# Altium PCB PCB1.PcbDoc
Units mil, origin at the board's own origin, x right, y up, seen from the top; angles counter-clockwise.
Board outline 6000 x 4000 mil, 2 copper layers (Top Layer, Bottom Layer); 38 components, 28 nets, 109 pads, 0 vias.
Unrouted connection lines stored in the file: 65.
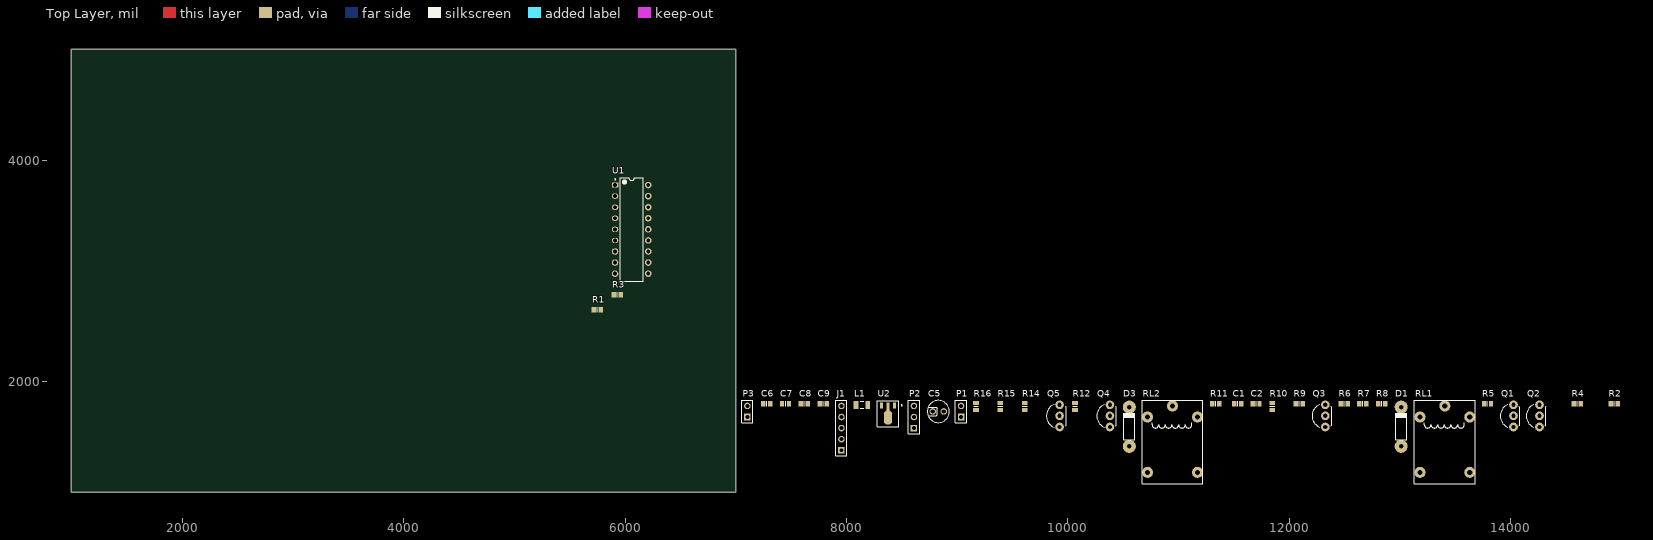
[diagram p0: Top Layer view]
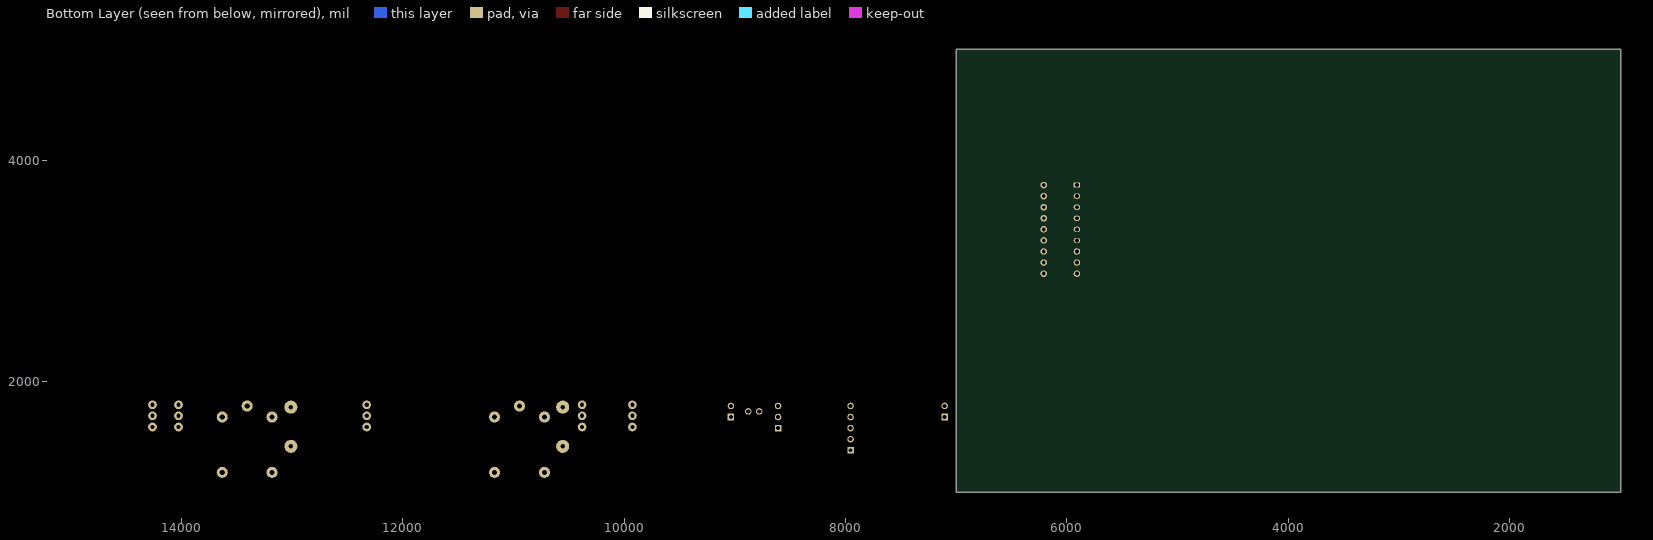
[diagram p1: Bottom Layer view, seen from below]

## Layer stack, top to bottom
Top Solder: solder mask 0.4, Solder Resist, Dk 3.5
Top Layer: signal copper 1.4
Dielectric 1: dielectric 12.6, FR-4, Dk 4.8
Bottom Layer: signal copper 1.4
Bottom Solder: solder mask 0.4, Solder Resist, Dk 3.5

## Board outline
1000,1000 7000,1000 7000,5000 1000,5000

## Design rules (kind name [scope] priority, off if disabled: settings)
Clearance [All] p1: gap=10
PolygonConnect [All] p1: connectstyle=Relief reliefconductorwidth=10 reliefentries=4 polygonreliefangle="90 Angle" airgapwidth=10
RoutingVias [All] p1: holewidth=28 width=50 viastyle="Through Hole" minholewidth=28 minwidth=50 maxholewidth=28 maxwidth=50
SolderMaskExpansion [All] p1: expansion=4
Width [All] p1: maxlimit=10 minlimit=10 preferedwidth=10
30 further rules are at their usual default settings.

## Components (designator, comment, footprint, x,y, rotation, side; value= is the part's Value field where it differs from the comment)
C1 "Cap Semi" RESC2012L 11535,1800 r0 top
C2 "Cap Semi" RESC2012L 11700,1800 r0 top
C5 "Cap Pol1" CAP5 8830,1730 r0 top
C6 "Cap Semi" RESC2012L 7280,1800 r0 top
C7 "Cap Semi" RESC2012L 7450,1800 r0 top
C8 "Cap Semi" RESC2012L 7620,1800 r0 top
C9 "Cap Semi" RESC2012L 7790,1800 r0 top
D1 "" D1A 13010,1415 r90 top
D3 "" D1A 10555,1415 r90 top
J1 "programer" HDR1x5 7955,1380 r90 top
L1 "" INDC3216 8140,1790 r0 top
P1 "LED" HDR1X2 9035,1680 r90 top
P2 "Header 3" HDR1X3 8610,1580 r90 top
P3 "Header 2" HDR1X2 7105,1680 r90 top
Q1 "C2383" C1815 14025,1690 r90 top
Q2 "C2383" C1815 14260,1690 r90 top
Q3 "C1815" C1815 12325,1690 r90 top
Q4 "C1815" C1815 10380,1690 r90 top
Q5 "C1815" C1815 9925,1690 r90 top
R1 "2.2K" RESC2012L 5750,2650 r0 top
R2 "2.2K" RESC2012L 14935,1800 r0 top
R3 "1K" RESC2012L 5930,2785 r0 top
R4 "1K" RESC2012L 14600,1800 r0 top
R5 "470" RESC2012L 13790,1800 r0 top
R6 "10K" RESC2012L 12495,1800 r0 top
R7 "470" RESC2012L 12665,1800 r0 top
R8 "10K" RESC2012L 12835,1800 r0 top
R9 "470" RESC2012L 12090,1800 r0 top
R10 "10K" RESC2012L 11845,1775 r90 top
R11 "470" RESC2012L 11335,1800 r0 top
R12 "470" RESC2012L 10065,1775 r90 top
R14 "470" RESC2012L 9610,1775 r90 top
R15 "10K" RESC2012L 9390,1775 r90 top
R16 "Res3" RESC2012L 9170,1775 r90 top
RL1 "" RL7 13405,1780 r0 top
RL2 "" RL7 10945,1780 r0 top
U1 "PIC18F1220-E/P" PDIP300-P18 6060,3375 r0 top
U2 "µA78L05ACPKR" PK03 8375,1730 r0 top

## Footprints (in the part's own frame and the unit in brackets; to place one, negate y for a bottom-side part, rotate by r counter-clockwise, add the part's x,y. Pads: shape width x height; smd on the part's side, far side on the other; paste and mask are expansions set on the pad)
C1815 [mil]
  round 78 hole 39.37: 1(100,0) 2(0,0) 3(-100,0)
  silkscreen extent -103,-58 103,119
CAP5 [mm]
  round 1.5 hole 1 mask+0.01: 1(1.27,0) 2(-1.27,0)
  silkscreen extent -2.54,-2.54 2.54,2.54
D1A [mm]
  round 3 hole 1: 1(0,0) 2(9,0)
  silkscreen extent 1.5,-1.27 7.6,1.27
HDR1X2 [mm] "Connector; Header; 2 Position"
  rect 1.5x1.5 hole 0.9: 1(0,0)
  round 1.5 hole 0.9: 2(2.54,0)
  silkscreen extent -1.27,-1.27 3.81,1.27
HDR1X3 [mm] "Connector; Header; 3 Position"
  rect 1.5x1.5 hole 0.9: 1(0,0)
  round 1.5 hole 0.9: 2(2.54,0) 3(5.08,0)
  silkscreen extent -1.27,-1.27 6.35,1.27
HDR1x5 [mm] "Connector; Header; 5 Position"
  rect 1.5x1.5 hole 0.9: 1(0,0)
  round 1.5 hole 0.9: 2(2.54,0) 3(5.08,0) 4(7.62,0) 5(10.16,0)
  silkscreen extent -1.27,-1.27 11.43,1.27
INDC3216 [mm] "Chip Inductor, Body 3.2x1.6mm, IPC High Density"
  rect 1.1x1.8 smd: 1(-1.35,0) 2(1.35,0)
  silkscreen extent -0.4,-0.8 0.4,0.8, body extent -1.7,-0.9 1.7,0.9, height 0.55
PDIP300-P18 [mm] "DIP, 18-Leads, Row Spacing 7.62mm, Pitch 2.54mm, Body 22.9x6.6mm"
  rect 1.5x1.2 hole 0.9: 1(-3.81,10.16)
  oval 1.5x1.2 hole 0.9: 2(-3.81,7.62) 3(-3.81,5.08) 4(-3.81,2.54) 5(-3.81,0) 6(-3.81,-2.54)
  round 1.5 hole 0.9: 7(-3.81,-5.08) 8(-3.81,-7.62) 9(-3.81,-10.16) 10(3.81,-10.16) 11(3.81,-7.62) 12(3.81,-5.08) 13(3.81,-2.54) 14(3.81,0) 15(3.81,2.54) 16(3.81,5.08) 17(3.81,7.62) 18(3.81,10.16)
  silkscreen extent -3.93,-11.85 2.65,11.85, body extent -3.6,-11.8 3.6,11.8, height 5.34
PK03 [mm] "SOT-89; Body 4.6 x 4.25 mm, inc. leads (LxW max)"
  rect 0.7x1.35 smd: 1(1.5,1.388) 3(-1.5,1.388)
  rect 0.7x1.8 smd: 2(0,1.162)
  oct 1.9x3.3 smd: 4(0,-1.388)
  silkscreen extent -2.5,-3.49 3.28,2.51
RESC2012L [mm] "Chip Resistor, Body 2.0x1.3mm, IPC High Density"
  rect 1x1.3 smd: 1(-0.8,0) 2(0.8,0)
  silkscreen extent 0,-0.55 0,0.55, body extent -1.07,-0.7 1.07,0.7, height 0.65
RL7 [mm]
  round 2.54 hole 1.2: 1(0,0) 2(5.715,-15.24) 3(-5.715,-15.24) 4(5.715,-2.54) 5(-5.715,-2.54)
  silkscreen extent -6.98,-17.91 6.98,1.27

## Part data
C1 C2 C6 C7 C8 C9: "Capacitor (Semiconductor SIM Model)"
C5: "Polarized Capacitor (Radial)"
D1 D3: library part DIODE, "Diode"
J1: library part CON5, "Connector"
L1: library part Inductor, "Inductor"
P1: library part "Header 2", "Header, 2-Pin"
P2: "Header, 3-Pin"
P3: "Header, 2-Pin"
Q1 Q2 Q3 Q4 Q5: library part NPN, "NPN Transistor"
R1 R2 R3 R4 R5 R6 R7 R8 R9 R10 R11 R12 R14 R15: library part RES2
R16: "Resistor"
RL1 RL2: library part RELAY-SPDT
U1: "High Performance, Enhanced Flash Microcontroller with 10-Bit A/D and nanoWatt Technology, 4K Flash, 18-Pin PDIP, Extended Temperature"
U2: "Positive-Voltage Regulator"

## Nets (pads, with @x,y where several pads share a name; then routed paths per layer and width w, separated by ;. In a path a pad name is that pad's centre, name@x,y a point inside that pad or via, vN(x,y) a via of type N, cw(c..) or ccw(c..) an arc to the next point about the centre after c; other vN are vias at no path point)
12V: D1.2 D3.2 L1.1 RL1.3 RL1.4 RL2.3 RL2.4
+5V: C1.2 C2.2 C8.2 C9.2 R11.1 U1.14 U2.1
DOOR_LOCK: Q1.2
DOOR_LOCK_C: J1.5 R5.1 U1.12
DOOR_LOCK_SIG: R2.2 R4.2 U1.17
DOOR_UNLOCK: Q2.2
DOOR_UNLOCK_C: J1.4 R7.2 U1.13
DOOR_UNLOCK_SIG: R1.2 U1.9
GND: C1.1 C2.1 C5.2 C6.1 C7.1 C8.1 C9.1 J1.3 P1.1 P2.2 Q1.3 Q2.3 Q3.3 Q4.3 Q5.3 R3.2 R6.2 R8.2 R10.2 R15.1 RL1.2 RL2.2 U1.5 U2.2 U2.4
MO_TURN_LEFT: R14.2 U1.16
MO_TURN_RIGHT: R9.2 U1.15
MOTOR_N: RL2.1
MOTOR_P: RL1.1
NetC5_1: C5.1 C6.2 C7.2 L1.2 U2.3
NetD1_1: D1.1 Q3.2 RL1.5
NetD3_1: D3.1 Q5.2 RL2.5
NetP1_2: P1.2 R16.2
NetQ1_1: Q1.1 R5.2
NetQ2_1: Q2.1 R7.1
NetQ3_1: Q3.1 R9.1
NetQ4_1: Q4.1 R12.2
NetQ5_1: Q5.1 R14.1 R15.2
RST: J1.1 U1.4
RX: P2.1 U1.10
SPEED_SIGNAL_I: R12.1
SPEED_SIGNAL_O: Q4.2 R11.2 U1.8
STATUS: R16.1 U1.11
TX: P2.3
pads on no net: J1.2 P3.1 P3.2 R1.1 R2.1 R3.1 R4.1 R6.1 R8.1 R10.1 U1.1 U1.2 U1.3 U1.6 U1.7 U1.18